# EAGLE board Projeto Genius- LIP (EAGLE 9.7.0)

Size 192.48 x 73 mm. Coordinates in mm from the lower left corner, seen from the top.
Outline: 0,0 192.48,0 192.48,73 0,73 0,0
Copper layers (1*16): Top 0.035mm / dielectric 1.5mm / Bottom 0.035mm
Design rules "default": minimum track width 6mil, minimum drill 0.35mm, track to track 6mil, track to pad 6mil, pad to pad 6mil, via to via 6mil, smd to smd 6mil, copper to edge 40mil, drill to drill 6mil, minimum pad ring 10mil, minimum via ring 8mil, stop-mask expansion 4mil, vias tented up to drill 0mil, thermal gap 10mil

## Footprints (pad centres in the part's own frame; a part is rotated, then mirrored left to right if it is on the bottom)
LEDRD254W60D565H860B_Y = drill 0.981 pad 1.581: 1 -1.27,0; 2 1.27,0
LEDRD254W60D565H860B_B = drill 0.981 pad 1.581: 1 -1.27,0; 2 1.27,0
LEDRD254W60D565H860B_G = drill 0.981 pad 1.581: 1 -1.27,0; 2 1.27,0
LEDRD254W60D565H860B = drill 0.981 pad 1.581: 1 -1.27,0; 2 1.27,0
PIEZO = drill 1 pad 1.6: 1 -3.5,0; 2 3.5,0
RESAD1016W63L850D250B = drill 0.83 pad 1.43: 1 -5.08,0; 2 5.08,0
HA-06-SM065 = drill 1 pad 1.676: 1 -2.54,-2.54; 2 0,2.54; 3 2.54,-2.54
SWITCH-MOMENTARY-PTH-6.5MM = drill 1.016 pad 1.88: 1 -3.251,2.261; 2 3.251,2.261; 3 -3.251,-2.261; 4 3.251,-2.261
ARDUINO-UNO-R3-SHIELD = drill 1.016 pad 1.88: 3.3V 24.13,-2.54; 5V 24.13,0; A0 24.13,12.7; A1 24.13,15.24; A2 24.13,17.78; A3 24.13,20.32; A4 24.13,22.86; A5 24.13,25.4; AREF -24.13,-13.97; D2 -24.13,20.32; D3 -24.13,17.78; D4 -24.13,15.24; D5 -24.13,12.7; D6 -24.13,10.16; D7 -24.13,7.62; D8 -24.13,3.81; D9 -24.13,1.27; D10 -24.13,-1.27; D11 -24.13,-3.81; D12 -24.13,-6.35; D13 -24.13,-8.89; GND@0 24.13,2.54; GND@1 24.13,5.08; GND@2 -24.13,-11.43; IOREF 24.13,-7.62; NC 24.13,-10.16; RES 24.13,-5.08; RX -24.13,25.4; SCL -24.13,-19.05; SDA -24.13,-16.51; TX -24.13,22.86; VIN 24.13,7.62

## Placement (x,y rotation side)
D1  YELLOW  [LEDRD254W60D565H860B_Y]  144.85,52.4 180 top
D2  BLUE  [LEDRD254W60D565H860B_B]  157.55,52.4 180 top
D3  GREEN  [LEDRD254W60D565H860B_G]  170.25,52.4 180 top
D4  RED  [LEDRD254W60D565H860B]  182.95,52.4 180 top
PIEZO1  PIEZO  [PIEZO]  118.18,40.97 90 top
R1  1k  [RESAD1016W63L850D250B]  118.18,60.02 90 top
R2  1k  [RESAD1016W63L850D250B]  143.58,60.02 90 top
R3  1k  [RESAD1016W63L850D250B]  156.28,60.02 90 top
R4  1k  [RESAD1016W63L850D250B]  168.98,60.02 90 top
R5  1k  [RESAD1016W63L850D250B]  181.68,60.02 90 top
RPOT1  250k  [HA-06-SM065]  50.69,7.05 180 top
S1  SWITCH_MOMENTARY  [SWITCH-MOMENTARY-PTH-6.5MM]  184.22,40.97 90 top
S2  SWITCH_MOMENTARY  [SWITCH-MOMENTARY-PTH-6.5MM]  171.52,40.97 90 top
S3  SWITCH_MOMENTARY  [SWITCH-MOMENTARY-PTH-6.5MM]  146.12,40.97 90 top
S4  SWITCH_MOMENTARY  [SWITCH-MOMENTARY-PTH-6.5MM]  158.82,40.97 90 top
U1  ARDUINO-UNO-R3-SHIELD  [ARDUINO-UNO-R3-SHIELD]  47.88,43.16 270 top

## Library data of the parts
D1 = Tinkercad; CATEGORY: Opto-Electronic; SUB-CATEGORY: LED; VALUE: LED_YELLOW
D2 = Tinkercad; CATEGORY: Opto-Electronic; SUB-CATEGORY: LED; VALUE: LED_BLUE
D3 = Tinkercad; CATEGORY: Opto-Electronic; SUB-CATEGORY: LED; VALUE: LED_GREEN
D4 = Tinkercad; CATEGORY: Opto-Electronic; SUB-CATEGORY: LED; VALUE: LED_RED
PIEZO1 R1-R5 RPOT1 S1-S4 U1 = Tinkercad

## Nets
PIEZO1_2: PIEZO1.2 R1.1
S1_2: D4.2 R5.1 S1.1 S1.2
S2_2: D3.2 R4.1 S2.1 S2.2
S3_2: D1.2 R2.1 S3.1 S3.2
S4_2: D2.2 R3.1 S4.1 S4.2
U1_5V: RPOT1.1 U1.5V
U1_A1: RPOT1.2 U1.A1
U1_D2: PIEZO1.1 U1.D2
U1_D4: D1.1 U1.D4
U1_D5: D2.1 U1.D5
U1_D6: D3.1 U1.D6
U1_D7: D4.1 U1.D7
U1_D8: S3.3 S3.4 U1.D8
U1_D9: S4.3 S4.4 U1.D9
U1_D10: S2.3 S2.4 U1.D10
U1_D11: S1.3 S1.4 U1.D11
U1_GND: R1.2 R2.2 R3.2 R4.2 R5.2 RPOT1.3 U1.GND@0 U1.GND@1 U1.GND@2

## Tracks (layer width: path | path; a pad name or v marks a point on that pad's centre or on a via)
PIEZO1_2  (1 unrouted)
S1_2  (3 unrouted)
S2_2  (3 unrouted)
S3_2  (3 unrouted)
S4_2  (3 unrouted)
U1_5V  (1 unrouted)
U1_A1  (1 unrouted)
U1_D2  (1 unrouted)
U1_D4  (1 unrouted)
U1_D5  (1 unrouted)
U1_D6  (1 unrouted)
U1_D7  (1 unrouted)
U1_D8  (2 unrouted)
U1_D9  (2 unrouted)
U1_D10  (2 unrouted)
U1_D11  (2 unrouted)
U1_GND  (8 unrouted)